# Altium PCB Main_Board.PcbDoc (part 14 of 14)
Units mm, origin at the board's own origin, x right, y up, seen from the top; angles counter-clockwise.
Board outline 142 x 82 mm, 10 copper layers (L1_Top, L2_PWR1, L3_Sig1, L4_GND1, L5_Sig2, L6_Sig3, L7_GND2, L8_Sig4, L9_GND3, L8_Bottom), stack 1.71 mm thick; 299 components, 328 nets, 2329 pads, 2908 vias.
Unrouted connection lines stored in the file: 2.
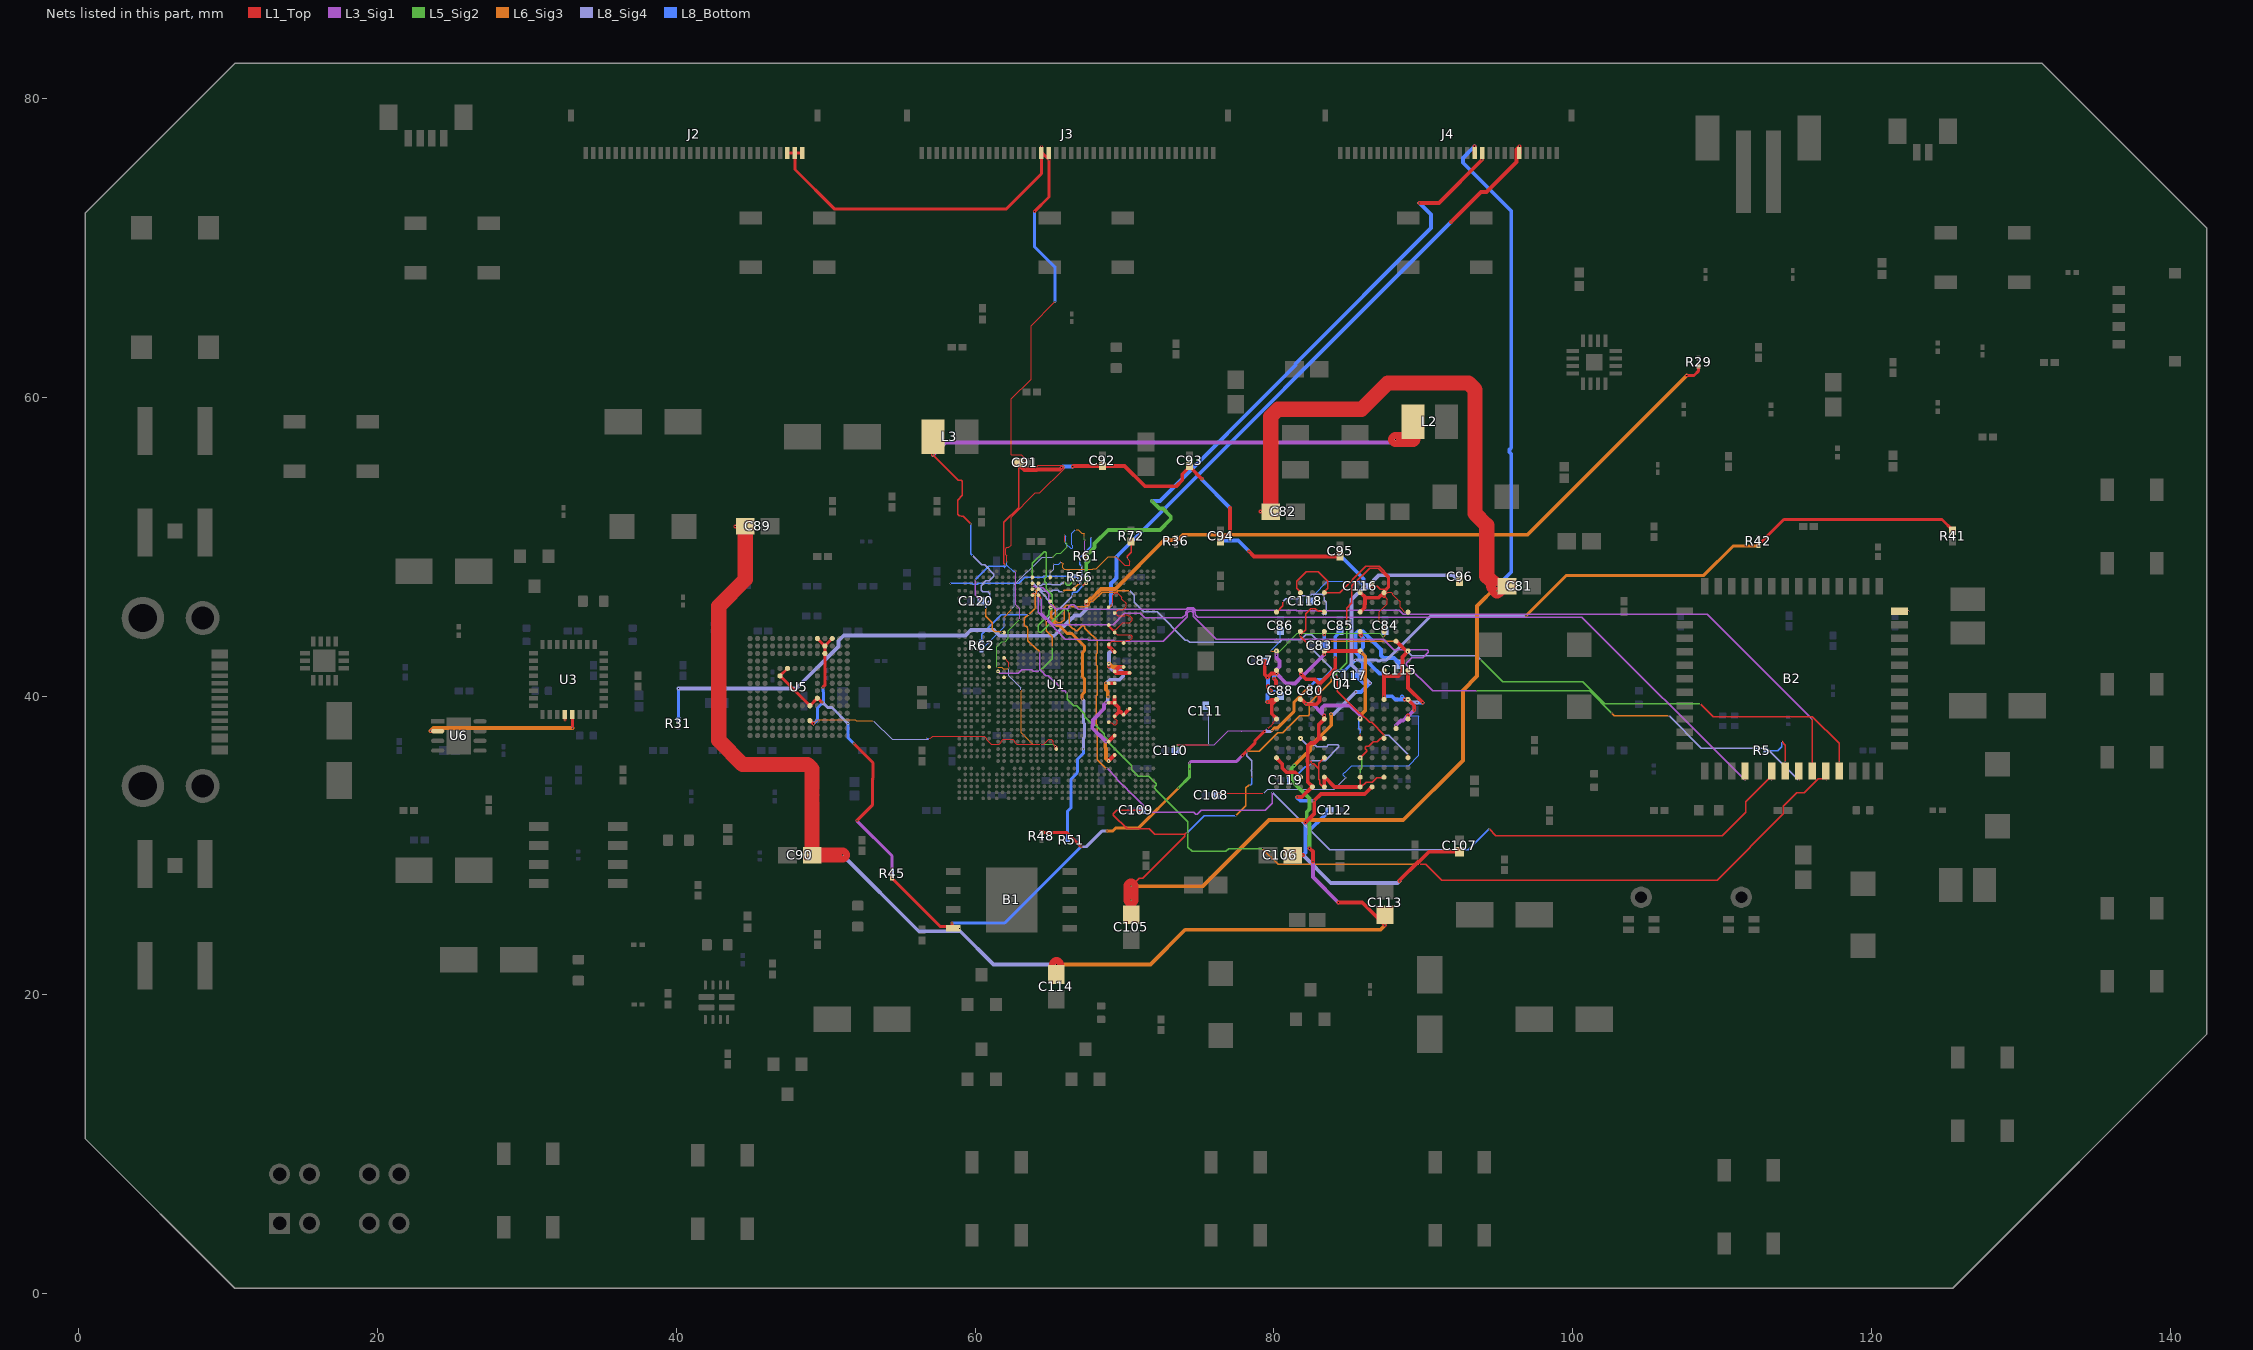
[diagram p21: the nets of this part, all layers, seen from the top]

## Via types
v1: diameter 0.1, hole 0.08, L1_Top to L8_Bottom, 1169 vias
v2: diameter 0.01, hole 0.01, L3_Sig1 to L8_Sig4, 433 vias
v3: diameter 0.01, hole 0.01, L8_Sig4 to L8_Bottom, 375 vias
v4: diameter 0.01, hole 0.01, L1_Top to L3_Sig1, 355 vias
v5: diameter 0.254, hole 0.01, L1_Top to L8_Bottom, 150 vias
v6: diameter 0.01, hole 0.01, L6_Sig3 to L8_Bottom, 129 vias
v7: diameter 0.05, hole 0.04, L1_Top to L8_Bottom, 104 vias
v8: diameter 0.01, hole 0.01, L1_Top to L5_Sig2, 89 vias
v9: diameter 0.01, hole 0.01, L1_Top to L8_Bottom, 41 vias
v10: diameter 0.1, hole 0.08, L1_Top to L3_Sig1, 17 vias
v11: diameter 0.1, hole 0.08, L1_Top to L5_Sig2, 11 vias
v12: diameter 0.1, hole 0.08, L8_Sig4 to L8_Bottom, 10 vias
v13: diameter 0.1, hole 0.08, L6_Sig3 to L8_Bottom, 9 vias
v14: diameter 1.27, hole 0.711, L1_Top to L8_Bottom, 8 vias
v15: diameter 0.4, hole 0.2, L1_Top to L8_Bottom, 4 vias
v16: diameter 0.05, hole 0.08, L1_Top to L8_Bottom, 3 vias
v17: diameter 0.05, hole 0.08, L6_Sig3 to L8_Bottom, 1 vias

## Nets (pads, with @x,y where several pads share a name; then routed paths per layer and width w, separated by ;. In a path a pad name is that pad's centre, name@x,y a point inside that pad or via, vN(x,y) a via of type N, cw(c..) or ccw(c..) an arc to the next point about the centre after c; other vN are vias at no path point) (continued)
VDDIO_3V3: J2.28 J2.29 J2.30 J3.17 J3.18 U1.AJ17 U1.R25 U5.C6 U5.M4 U5.N4 U5.P3 U5.P5 | length 101.6
  L1_Top w0.04: v4(56.936,37.091) 57.159,37.314 60.61,37.314 60.776,37.148 60.776,37.081 61.073,36.784 61.61,36.784 61.741,36.916 61.741,36.983 61.873,37.114 62.51,37.114 62.641,36.983 62.641,36.916 62.773,36.784 64.61,36.784 64.94,37.114 65.11,37.114 65.243,36.981 65.243,36.769 v1(65.388,36.624) ; U1.R25@61.941,42.639 U1.R25@61.941,42.549 62.252,42.239 v4(62.252,41.885) ; v4(62.128,48.972) 62.128,49.376 62.047,49.456 62.047,49.86 62.13,49.943 62.269,49.943 62.416,50.091 62.416,51.979 64.035,53.598 64.339,53.598 65.958,55.217 65.958,55.355 65.86,55.453 64.216,55.453 64.038,55.275 63.376,55.275 63.353,55.298 63.353,55.868 63.08,56.141 62.44,56.141 62.416,56.164 62.416,59.889 63.745,61.218 63.745,64.801 v3(65.34,66.396)
  L1_Top w0.2: J2.28@47.441,76.349 J2.29@47.941,76.349 ; J2.30@48.441,76.349 J2.29@47.941,76.349 ; U5.C6@48.941,38.349 48.964,38.349 v3(49.17,38.143) ; U5.P5@49.441,43.849 U5.N4@49.941,43.349 ; v4(49.808,40.579) 49.941,40.712 U5.M4@49.941,42.849 U5.N4@49.941,43.349 ; U5.P3@50.441,43.849 U5.N4@49.941,43.349 ; v4(63.965,72.424) 64.941,73.4 v1(64.941,75.899) ; J3.17@64.441,76.349 64.441,74.969 62.067,72.594 50.599,72.594 47.941,75.252 J2.29@47.941,76.349 ; J3.17@64.441,76.399 v1(64.441,76.799) ; J3.17@64.466,76.374 v1(64.941,75.899) ; J3.18@64.941,76.349 v1(64.941,75.899) ; v1(65.388,36.624) 65.432,36.581 65.432,36.459 U1.AJ17@65.441,36.449
  L3_Sig1 w0.04: v3(62.726,48.349) 62.726,46.096 62.993,45.83 v8(62.993,45.133)
  L5_Sig2 w0.04: v2(61.478,41.911) 61.451,41.937 61.451,43.311 61.785,43.645 62.011,43.645 62.226,43.861 62.226,44.366 v8(62.993,45.133) ; v2(64.375,36.77) 65.242,36.77 v1(65.388,36.624)
  L6_Sig3 w0.04: v3(49.17,38.143) 49.438,38.411 51.986,38.411 52.051,38.346 v6(53.185,38.346) ; v2(61.478,41.911) 61.799,41.911 61.877,41.833 62.199,41.833 v4(62.252,41.885) ; v6(63.041,40.37) 63.092,40.32 63.092,37.546 63.868,36.77 v2(64.375,36.77)
  L8_Sig4 w0.04: v6(53.185,38.346) 54.439,37.091 v4(56.936,37.091) ; v4(62.252,41.885) 62.252,41.36 63.041,40.57 v6(63.041,40.37)
  L8_Bottom w0.04: v3(56.739,37.18) 56.847,37.18 v4(56.936,37.091) ; v3(61.907,48.542) 62.128,48.764 ; v4(62.128,48.972) 62.128,48.764 ; v3(62.726,48.349) 62.542,48.349 62.128,48.764
  L8_Bottom w0.2: v3(49.17,38.143) 49.444,38.417 49.444,39.202 49.861,39.619 49.861,40.277 49.808,40.331 v4(49.808,40.579) ; v4(63.965,72.424) 63.965,70.097 65.34,68.722 v3(65.34,66.396)
  other v2: 56.936,37.091 49.17,38.143 49.808,40.579 62.252,41.885 62.726,48.349 61.907,48.542 62.128,48.972 65.34,66.396 63.965,72.424
  other v3: 56.936,37.091 49.808,40.579 62.128,48.972 63.965,72.424
  other v4: 49.17,38.143 61.907,48.542 65.34,66.396
VDDIO_BOOT: B1.8 C80.2 R41.2 R42.2 R45.1 R48.2 U5.E6 U5.F5 U5.J10 U5.K9 | length 108.1
  L1_Top w0.2: U5.K9@47.441,41.849 U5.J10@46.941,41.349 U5.E6@48.941,39.349 U5.F5@49.441,39.849 49.482,39.849 49.742,39.589 v4(49.764,39.589) ; v3(51.888,36.806) 53.165,35.529 53.165,34.666 53.177,34.653 53.177,34.501 53.119,34.442 53.119,32.692 v4(52.085,31.658) ; v4(54.441,27.795) 54.473,27.764 57.667,24.569 58.416,24.569 B1.8@58.541,24.444 58.441,24.544 v4(58.441,24.803) ; R48.2@64.441,30.858 66.14,30.858 v4(67.089,29.909) ; v4(77.891,36.014) 78.749,36.872 78.749,37.015 79.352,37.618 v4(79.376,37.618) ; v9(112.441,50.049) 112.441,50.141 112.607,50.306 112.623,50.306 114.14,51.823 124.722,51.823 125.441,51.104 R41.2@125.441,51.058
  L3_Sig1 w0.2: v4(52.085,31.658) 54.441,29.302 v4(54.441,27.795) ; v8(74.349,35.508) 74.473,35.632 77.509,35.632 v4(77.891,36.014)
  L5_Sig2 w0.2: v2(73.618,33.842) 74.369,34.593 v8(74.369,35.101) 74.369,35.488 v8(74.349,35.508)
  L6_Sig3 w0.2: v6(68.842,30.955) 69.202,30.955 69.399,31.152 70.928,31.152 v2(73.618,33.842) ; v6(79.869,37.698) 80.018,37.847 80.229,37.847 81.335,38.953 81.335,39.558 v6(82.441,40.664) ; v6(96.877,45.375) 99.583,48.081 108.785,48.081 110.753,50.049 v9(112.441,50.049)
  L8_Sig4 w0.2: v4(49.764,39.589) 50.129,39.224 50.415,39.224 v3(51.491,38.148) ; v4(67.089,29.909) 67.441,29.909 68.487,30.955 v6(68.842,30.955) ; v4(79.376,37.618) 79.789,37.618 v6(79.869,37.698) ; v3(85.448,42.394) 85.459,42.405 86.915,42.405 86.984,42.336 87.088,42.336 87.157,42.405 87.554,42.405 90.524,45.375 v6(96.877,45.375)
  L8_Bottom w0.2: v3(51.491,38.148) 51.491,37.203 v3(51.888,36.806) ; v4(58.441,24.803) 61.983,24.803 v4(67.089,29.909) ; v6(82.441,40.664) 82.456,40.664 82.91,41.117 83.289,41.117 83.872,41.701 84.755,41.701 v3(85.448,42.394)
  other v1: 58.966,24.444
  other v2: 58.441,24.803 67.089,29.909 51.888,36.806 79.376,37.618 49.764,39.589
  other v3: 58.441,24.803 67.089,29.909
  other v4: 51.888,36.806
VDDIO_H: U1.V25 | length 0.2
  L1_Top w0.04: U1.V25@61.941,41.249 v1(62.116,41.249)
VDDIO_LX: R61.1 R62.1 | length 15.7
  L1_Top w0.04: v4(65.998,50.774) 66.011,50.761 v8(66.011,50.318) ; v4(67.372,49.629) 67.372,49.164 v4(67.441,49.095)
  L3_Sig1 w0.04: v8(67.348,50.425) 67.348,49.654 v4(67.372,49.629)
  L5_Sig2 w0.04: v2(65.208,49.304) 65.47,49.566 65.74,49.566 v8(66.147,49.973) 66.147,50.182 v8(66.011,50.318) ; v2(67.298,50.655) 67.298,50.475 v8(67.348,50.425)
  L6_Sig3 w0.04: v6(61.941,45.281) 62.425,45.764 v6(62.425,45.826) ; v6(66.721,51.128) 66.907,51.128 67.132,50.902 67.275,50.902 67.298,50.879 v2(67.298,50.655)
  L8_Sig4 w0.04: v6(62.425,45.826) 62.62,46.021 62.62,47.443 64.48,49.304 v2(65.208,49.304)
  L8_Bottom w0.04: R62.1@60.441,43.095 60.441,43.141 61.941,44.641 v6(61.941,45.281) ; v4(65.998,50.774) 66.08,50.692 66.08,50.205 66.396,49.889 66.471,49.889 66.525,49.942 66.525,50.083 66.478,50.13 66.478,50.885 v6(66.721,51.128)
  other v2: 67.441,49.095 65.998,50.774
  other v3: 67.441,49.095 65.998,50.774
VDDIO_M: L2.1 L3.1 U1.L25 | length 51.1
  L1_Top w0.1: v1(57.19,56.126) 58.888,54.428 59.088,54.428 59.147,54.369 59.147,53.435 58.828,53.116 58.828,52.181 58.929,52.081 59.023,52.081 59.074,52.03 59.197,52.03 v4(59.711,51.516)
  L1_Top w0.254: v1(57.19,56.146) L3.1@57.19,57.349
  L1_Top w1.016: v1(88.134,57.167) 89.29,57.167 89.316,57.193 L2.1@89.316,58.349
  L3_Sig1 w0.254: v1(57.19,56.126) 58.028,56.964 87.931,56.964 v1(88.134,57.167)
  L5_Sig2 w0.1: v2(61.738,44.249) 61.831,44.249 v8(61.843,44.261)
  L6_Sig3 w0.1: v6(60.701,45.862) 60.724,45.839 60.724,45.331 61.14,44.916 61.14,44.466 61.318,44.288 61.698,44.288 v2(61.738,44.249)
  L8_Sig4 w0.1: v3(59.829,49.39) 60.446,48.773 60.631,48.773 61.248,48.155 61.248,48.013 60.94,47.705 60.705,47.705 60.397,47.398 60.397,47.077 60.499,46.976 60.875,46.976 60.991,46.86 60.991,46.57 61.067,46.494 61.067,46.406 61.014,46.353 60.929,46.353 60.724,46.148 60.724,45.885 v6(60.701,45.862)
  L8_Bottom w0.1: v4(59.711,51.516) 59.711,49.508 v3(59.829,49.39)
  other v2: 59.711,51.516
  other v3: 59.711,51.516
VDDIO_X: R51.2 U1.G18 | length 17.5
  L6_Sig3 w0.203: v9(65.086,45.917) 65.086,45.263 65.209,45.14 65.209,44.97 65.462,44.717 65.632,44.717 66.167,44.183 66.476,44.183 67.313,43.345 67.313,43.038 67.201,42.927 67.201,41.272 67.313,41.16 67.313,40.25 67.151,40.088 67.151,39.837 v6(67.196,39.793)
  L8_Sig4 w0.203: v6(67.196,39.793) 67.277,39.711 67.277,38.938 67.245,38.905 67.245,38.227 67.313,38.158 67.313,37.249 67.265,37.201 v3(67.265,36.454)
  L8_Bottom w0.203: R51.2@66.187,30.349 66.187,32.287 66.435,32.535 66.435,34.443 66.823,34.831 66.823,34.913 66.87,34.96 66.87,35.787 67.265,36.182 v3(67.265,36.454)
VDDIO_Z: U1.T28
VDDIOC_SW: J4.20 U1.C12 U1.U26 | length 55.5
  L1_Top w0.1: v4(67.217,47.369) 67.22,47.369 67.401,47.549 v8(67.441,47.549)
  L1_Top w0.254: v4(89.76,73.007) 91.049,73.007 v1(93.941,75.899) J4.20@93.941,76.349
  L3_Sig1 w0.1: v4(61.541,41.649) 61.661,41.529 62.876,41.529 63.116,41.769 63.782,41.769 63.902,41.649 v8(64.303,41.649)
  L5_Sig2 w0.1: v8(64.303,41.649) 64.316,41.649 64.42,41.752 64.42,41.776 64.49,41.846 64.513,41.846 65.161,42.494 65.161,43.272 v2(65.167,43.278)
  L5_Sig2 w0.254: v8(67.441,47.549) 67.441,48.88 67.593,49.032 67.593,49.158 67.492,49.259 67.492,49.451 67.995,49.953 67.995,50.204 68.91,51.119 72.376,51.119 73.1,51.843 73.1,52.028 72.582,52.546 72.348,52.546 v9(71.83,53.064)
  L6_Sig3 w0.1: v6(64.779,45.066) 64.779,44.366 65.167,43.978 v2(65.167,43.278)
  L8_Sig4 w0.1: v6(64.779,45.066) 65.587,45.874 65.711,45.874 66.511,46.673 v3(66.511,46.688)
  L8_Bottom w0.1: v3(66.511,46.688) 66.506,46.693 66.506,46.9 66.565,46.959 66.807,46.959 v4(67.217,47.369)
  L8_Bottom w0.254: v9(71.83,53.064) 72.369,53.064 81.449,62.144 81.449,62.242 90.53,71.323 90.53,72.237 v4(89.76,73.007)
  other v2: 67.217,47.369 89.76,73.007
  other v3: 67.217,47.369 89.76,73.007
VDDNPU_PWM: U1.F18
VDDQ_1V1: C81.1 C82.1 C83.1 C84.1 C85.1 C86.1 C87.1 C88.1 C105.1 C106.1 C107.1 C108.1 C109.1 C110.1 C111.1 C112.1 J4.19 U4.A4 U4.A9 U4.AB4 U4.F5 U4.F8 U4.G2 U4.H1 U4.H5 U4.H8 U4.H12 U4.K1 U4.K3 U4.K10 U4.K12 U4.N1 U4.N3 U4.N10 U4.N12 U4.R1 U4.R5 U4.R8 U4.R12 U4.T2 U4.U5 U4.U8 | length 281.6
  L1_Top w0.04: v8(73.524,36.729) 75.636,36.729 v4(75.658,36.751) ; v4(76.153,33.323) 76.305,33.475 v2(79.309,33.475) ; v4(79.58,37.839) 79.615,37.839 79.789,38.013 79.844,38.013 79.894,38.062 79.894,38.118 79.955,38.179 79.955,38.243 U4.H12@80.18,38.468 ; U4.R12@80.153,43.002 80.164,43.002 U4.R12@80.18,43.018
  L1_Top w0.1: v1(70.441,27.272) 70.973,27.803 71.211,27.803 74.03,30.622 74.03,30.754 ; v4(71.15,32.337) 71.138,32.349 69.479,32.349 69.256,32.126 69.256,32.026 70.174,31.108 71.667,31.108 72.021,30.754 74.03,30.754 ; v4(74.173,30.811) 74.171,30.813 74.089,30.813 74.03,30.754 ; v8(84.873,44.704) 84.873,45.89 85.228,46.245 85.228,47.373 86.405,48.551 86.991,48.551 87.62,47.922 87.62,47.327 87.451,47.158 87.111,47.158 86.921,47.348 v1(86.58,47.348) ; U4.F5@85.78,37.168 85.795,37.183 v4(85.795,37.456)
  L1_Top w0.254: C105.1@70.441,25.349 v1(70.441,26.344) ; v1(79.113,52.349) C82.1@79.79,52.349 ; v4(79.387,42.349) 79.387,41.44 v4(79.58,41.248) 79.83,41.498 v1(80.18,41.498) ; v4(79.58,39.601) 79.683,39.601 79.834,39.752 80.164,39.752 U4.K12@80.18,39.768 80.18,39.745 79.863,39.428 79.863,38.808 80.18,38.491 U4.H12@80.18,38.468 ; v4(79.603,40.68) 79.603,40.556 v3(79.81,40.349) ; v3(80.01,41.162) 80.146,41.026 v4(80.146,40.689) ; C106.1@81.267,29.349 v1(81.944,29.349) ; v3(81.587,33.231) 81.87,33.231 82.58,33.941 82.263,34.258 82.263,35.567 82.235,35.595 82.235,35.761 82.263,35.788 82.263,36.649 82.465,36.851 82.711,36.851 83.012,37.152 ; U4.K10@81.78,39.768 81.796,39.752 81.886,39.752 v4(82.159,39.479) 82.187,39.451 82.849,39.451 83.063,39.665 83.063,40.809 ; U4.N10@81.78,41.718 81.796,41.701 81.796,41.481 v1(81.829,41.449) 82.158,41.12 82.752,41.12 83.063,40.809 ; v3(82.126,31.537) 82.698,32.109 v4(82.698,32.989) 83.154,33.445 86.084,33.445 86.557,33.918 U4.A4@86.58,33.918 ; U4.F8@83.38,37.168 83.364,37.152 83.012,37.152 ; v1(83.38,38.688) U4.H8@83.38,38.468 83.012,38.1 83.012,37.152 ; v1(83.38,42.798) U4.R8@83.38,43.018 U4.R5@85.78,43.018 ; v1(83.38,44.098) U4.U8@83.38,44.318 ; v4(84.106,42.559) 84.106,41.852 83.063,40.809 ; U4.U5@85.78,44.318 85.796,44.302 85.796,44.082 v1(85.834,44.044) ; v1(86.58,47.348) U4.AB4@86.58,47.568 ; U4.K3@87.38,39.768 v1(87.38,39.988) v1(87.38,41.498) ; U4.N3@87.38,41.718 v1(87.38,41.498) ; U4.T2@88.196,43.652 88.22,43.652 88.837,43.034 88.964,43.034 U4.R1@88.98,43.018 88.98,42.995 88.604,42.619 88.604,41.595 88.34,41.331 87.547,41.331 v1(87.38,41.498) ; v4(88.418,27.621) 88.418,27.668 89.675,28.925 89.734,28.925 90.38,29.571 C107.1@92.441,29.571 ; v1(88.76,39.768) v2(88.98,39.768) 89.404,39.344 v4(89.404,39.058) ; U4.H1@88.98,38.468 v1(88.98,38.688) ; U4.N1@88.98,41.718 88.98,40.545 v4(89.969,39.556) ; J4.19@93.441,76.349 v1(93.441,76.799)
  L1_Top w1.016: v1(70.441,26.344) v1(70.441,27.272) ; C82.1@79.79,52.349 79.79,58.717 80.272,59.199 85.873,59.199 87.626,60.952 93.023,60.952 93.468,60.507 93.468,52.214 94.255,51.427 94.255,48.021 v1(94.927,47.349) ; 94.714,47.349 v1(94.927,47.349) ; C81.1@95.616,47.349 C81.1@95.256,47.349 ; v1(94.927,47.349) v1@94.938,47.349 ; v1@94.938,47.349 C81.1@95.256,47.349 ; v1@94.938,47.349 v1(94.938,47.032) C81.1@95.256,47.349
  L3_Sig1 w0.04: v8(73.524,36.729) 75.997,36.729 76.931,37.663 77.795,37.663 77.806,37.652 77.844,37.652 77.855,37.663 79.404,37.663 v4(79.58,37.839)
  L3_Sig1 w0.254: v1(80.174,42.804) v8(80.174,42.714) 80.174,42.554 80.377,42.35 80.377,41.962 80.18,41.765 v1(80.18,41.498) 80.835,40.843 81.411,40.843 81.923,41.355 v1(81.829,41.449) 82.031,41.449 v1(83.38,42.798) ; v4(82.159,39.479) 82.589,39.479 83.232,38.836 ; v1(83.38,38.688) 83.232,38.836 ; v4(85.78,38.486) v1(85.78,38.547) 85.78,38.688 85.098,39.37 83.38,39.37 83.232,39.221 83.232,38.836 ; v1(88.18,38.038) 88.508,38.366 88.658,38.366 v1(88.98,38.688) 89.034,38.688 v4(89.404,39.058)
  L5_Sig2 w0.04: v9(73.441,36.349) 73.524,36.432 v8(73.524,36.729) ; v2(80.158,43.002) 80.174,42.987 v1(80.174,42.804) ; v8(80.174,42.714) v1(80.174,42.804) ; v2(87.331,43.944) 87.087,44.188 84.873,44.188 81.57,44.188 80.186,42.804 v1(80.174,42.804)
  L5_Sig2 w0.1: v2(83.835,41.194) 84.873,42.232 84.873,44.188 v8(84.873,44.704)
  L6_Sig3 w0.04: v6(79.806,43.032) 79.836,43.002 v2(80.158,43.002) ; v2(87.331,43.944) 87.441,44.054 v6(87.441,44.349)
  L6_Sig3 w0.1: v6(77.451,31.988) 78.122,32.659 78.122,33.847 78.309,34.034 v6(78.398,34.034) ; v6(78.185,36.308) 79.011,36.308 80.26,37.557 80.599,37.557 81.73,38.688 82.315,38.688 82.385,38.758 82.385,39.523 83.835,40.972 v9(83.835,41.163)
  L6_Sig3 w0.254: v1(70.441,27.272) 75.256,27.272 79.676,31.691 88.667,31.691 92.655,35.679 92.655,40.378 93.609,41.332 93.609,46.031 v1(94.927,47.349) ; v1(85.78,38.547) 85.78,38.688 86.115,39.023 86.115,42.663 v1(85.88,42.898)
  L8_Sig4 w0.04: v3(75.441,39.349) 75.658,39.133 v4(75.658,36.751) ; v2(79.309,33.475) 79.588,33.754 84.057,33.754 v3(84.824,34.521)
  L8_Sig4 w0.1: v6(78.185,36.308) 78.185,36.007 78.53,35.662 78.53,35.069 78.5,35.039 78.5,34.977 78.53,34.947 v3(78.53,34.588)
  L8_Sig4 w0.254: v1(81.944,29.349) 83.813,27.481 88.278,27.481 v4(88.418,27.621) ; v2(88.98,39.768) 89.186,39.562 v3(89.58,39.562)
  L8_Bottom w0.04: v6(79.806,43.032) 80.441,43.667 C86.1@80.441,44.349 ; v3(84.824,34.521) 84.663,34.683 84.663,34.801 84.759,34.898 84.772,34.898 85.222,35.348 89.017,35.348 89.713,36.044 89.713,38.643 89.668,38.688 v1(88.98,38.688)
  L8_Bottom w0.1: v4(74.173,30.811) 75.35,31.988 v6(77.451,31.988) ; v6(78.398,34.034) 78.43,34.034 78.53,34.134 v3(78.53,34.588) ; v3(79.81,40.349) 80.087,40.349 80.214,40.222 80.26,40.222 80.441,40.041 C88.1@80.441,39.995 ; v1(85.78,38.547) 85.694,38.461 85.694,37.84 85.795,37.738 v4(85.795,37.456)
  L8_Bottom w0.254: v4(79.58,39.601) 79.58,40.119 v3(79.81,40.349) ; v4(79.58,41.248) 79.603,41.224 v4(79.603,40.68) ; v3(80.01,41.162) 80.01,41.328 v1(80.18,41.498) ; v3(81.587,33.231) 81.587,33.165 81.763,32.989 v4(82.698,32.989) ; v1(81.944,29.349) 82.126,29.531 82.126,30.742 ; v3(82.126,31.537) 82.126,30.742 ; v1(83.38,42.798) v1(83.38,44.098) ; C112.1@83.733,32.349 83.687,32.349 83.583,32.245 83.583,32.199 82.126,30.742 ; v4(84.106,42.559) 84.106,43.968 84.441,44.303 C85.1@84.441,44.349 ; v1(85.834,44.044) 85.977,43.901 85.977,43.262 85.88,43.166 v1(85.88,42.898) 85.994,42.784 85.994,42.584 86.462,42.116 86.462,42.095 86.56,41.997 86.581,41.997 87.08,41.498 v1(87.38,41.498) v1(87.38,39.988) 87.901,39.988 88.121,39.768 v1(88.76,39.768) 88.583,39.945 v3(88.583,39.974) ; v3(89.58,39.562) 89.586,39.556 v4(89.969,39.556) ; v1(93.441,76.799) 92.653,76.011 92.653,75.702 95.887,72.468 95.887,56.614 95.774,56.5 95.774,56.316 95.887,56.202 95.887,48.309 v1(94.927,47.349)
  other v2: 88.418,27.621 74.173,30.811 82.126,31.537 71.15,32.337 82.698,32.989 81.587,33.231 76.153,33.323 75.658,36.751 85.795,37.456 89.969,39.556 79.58,39.601 88.583,39.974 79.81,40.349 79.603,40.68 80.146,40.689 80.01,41.162 79.58,41.248 79.387,42.349 84.106,42.559
  other v3: 74.173,30.811 71.15,32.337 82.698,32.989 76.153,33.323 85.795,37.456 85.78,38.547 89.969,39.556 79.58,39.601 79.603,40.68 80.146,40.689 79.58,41.248 79.387,42.349 84.106,42.559
  other v4: 82.126,31.537 81.587,33.231 79.309,33.475 88.98,39.768 88.583,39.974 79.81,40.349 80.01,41.162 86.58,47.348
VDDQ_VDDQLP_EN: U1.D14
VDDQLP_0V6_1V1: J4.25 U1.AA8 U1.AB8 U1.AB9 U1.AC5 U1.AD6 U1.AD8 U1.AE9 U1.AG8 U1.AH9 U1.AK8 U1.AL9 U1.G9 U1.H8 U1.K9 U1.L8 U1.M6 U1.N9 U1.P8 U1.T6 U1.T9 U1.U5 U1.U8 U1.W8 U1.W9 | length 73
  L1_Top w0.04: U1.AE9@68.941,38.249 68.982,38.209 69.148,38.209 69.273,38.084 69.41,38.084 69.506,38.181 69.506,38.349 69.263,38.593 69.285,38.593 69.506,38.814 ; U1.N9@68.941,43.449 69.146,43.654 70.049,43.654 70.129,43.735 70.361,43.735 70.506,43.881 70.506,44.018 70.41,44.114 69.533,44.114 69.398,44.249 U1.L8@69.341,44.249 68.982,44.609 U1.K9@68.982,44.709 ; U1.K9@68.941,44.749 U1.K9@68.982,44.709 ; U1.G9@68.941,45.949 68.982,45.989 69.093,45.989 69.167,46.063 69.167,46.241 69.206,46.281 69.206,46.474 69.2,46.481 69.2,46.674 69.206,46.681 69.206,46.748 69.373,46.914 69.51,46.914 69.808,46.616 69.808,46.494 70.106,46.196 70.106,45.981 69.911,45.785 69.577,45.785 U1.H8@69.341,45.549 69.385,45.549 69.55,45.384 70.01,45.384 70.065,45.439 70.183,45.439 70.238,45.384 70.34,45.384 70.506,45.218 70.506,45.081 70.34,44.914 69.873,44.914 69.637,44.678 69.637,44.669 69.4,44.433 69.258,44.433 U1.K9@68.982,44.709
  L1_Top w0.1: U1.G9@68.941,45.949 68.961,45.949 v4(69.102,46.09)
  L1_Top w0.254: v9(68.941,35.649) U1.AK8@69.341,36.049 ; U1.AH9@68.941,36.949 U1.AG8@69.341,37.349 ; U1.AB9@68.941,39.549 U1.AB8@69.341,39.549 ; U1.W9@68.941,40.849 U1.W8@69.341,40.849 ; U1.T9@68.941,42.149 68.941,41.994 v4(68.964,41.971) ; U1.N9@68.941,43.449 68.941,43.349 v1(69.188,43.103) U1.P8@69.341,42.949 ; U1.AD8@69.341,38.649 69.506,38.814 69.613,38.921 ; U1.AA8@69.341,39.949 69.341,39.51 69.613,39.238 69.613,38.921 ; v1(69.766,41.949) 69.641,41.949 U1.U8@69.341,41.649 69.441,41.549 U1.U5@70.341,41.549 ; U1.AC5@70.341,39.149 U1.AD6@69.941,38.749 69.769,38.921 69.613,38.921 ; v2(91.861,71.731) 93.868,73.738 94.231,73.738 96.238,75.745 96.238,76.596 v1(96.441,76.799) J4.25@96.441,76.349
  L3_Sig1 w0.254: v1(68.766,36.949) 68.32,37.396 68.291,37.396 67.844,37.843 67.844,38.018 67.887,38.061 67.887,38.391 68.638,39.143 68.638,39.421 v1(68.766,39.549)
  L6_Sig3 w0.254: v1(68.766,36.949) 68.71,36.892 68.71,36.543 68.766,36.486 68.766,35.824 v9(68.941,35.649) ; v1(68.766,40.849) 68.766,40.443 68.885,40.324 v6(68.885,39.949) ; v9(68.971,42.179) 69.201,41.949 v1(69.766,41.949)
  L8_Sig4 w0.254: v1(68.766,39.549) 68.885,39.668 v6(68.885,39.949) ; v1(68.766,40.849) 69.011,41.094 69.672,41.094 69.917,41.339 69.917,41.566 69.756,41.726 69.209,41.726 v4(68.964,41.971) 68.964,42.879 v1(69.188,43.103)
  L8_Bottom w0.254: v4(69.102,46.09) 69.102,47.531 69.463,47.892 69.463,49.305 69.525,49.366 69.525,49.395 v2(91.861,71.731)
  other v1: 69.941,38.924 70.166,39.149
  other v2: 68.964,41.971 69.102,46.09
  other v3: 69.102,46.09 91.861,71.731
  other v4: 91.861,71.731
VDDQLP¨_0V6_1V1: C89.1 C90.1 C91.1 C92.1 C93.1 C94.1 C95.1 C96.1 C113.1 C114.1 C115.1 C116.1 C117.1 C118.1 C119.1 C120.1 | length 163.6
  L1_Top w0.1: v4(62.017,48.784) 61.928,48.873 61.928,51.618 62.929,52.619 C91.1@62.929,55.618
  L1_Top w0.254: v1(43.938,51.349) C89.1@44.616,51.349 ; C91.1@62.94,55.618 63.116,55.442 63.116,55.299 63.307,55.108 64.107,55.108 64.167,55.168 65.673,55.168 v2(65.791,55.286) ; v4(66.539,55.363) 66.567,55.391 C92.1@68.525,55.391 70.011,55.391 71.353,54.049 73.479,54.049 73.871,54.44 73.871,54.849 C93.1@74.367,55.345 ; C93.1@74.367,55.391 C93.1@74.367,55.345 ; v3(75.185,54.538) 75.174,54.538 C93.1@74.367,55.345 ; v3(76.441,50.404) 76.45,50.404 76.68,50.634 76.734,50.634 77.066,50.966 v3(77.066,52.591) ; v4(78.329,49.687) 78.667,49.349 84.387,49.349 v3(84.441,49.404) ; v8(82.395,29.81) 82.621,29.584 v4(82.621,28.93) ; v4(84.315,26.18) 85.917,26.18 v1(87.441,24.655)
  L1_Top w1.016: C89.1@44.616,51.349 44.616,47.791 42.846,46.021 42.846,37.012 44.433,35.425 48.775,35.425 49.092,35.107 C90.1@49.092,29.349 v1(51.126,29.349) ; C114.1@65.441,21.349 v1(65.441,22.027)
  L3_Sig1 w0.1: v3(60.001,47.787) 60.001,46.79 v2(60.441,46.349)
  L3_Sig1 w0.254: v4(82.621,28.93) 82.621,27.874 v4(84.315,26.18)
  L5_Sig2 w0.254: v2(81.367,35.354) 81.174,35.161 v9(81.174,34.273) 81.252,34.273 82.395,33.131 82.395,32.442 82.198,32.245 82.198,31.68 82.395,31.483 v8(82.395,29.81)
  L6_Sig3 w0.254: v1(65.441,22.027) 71.738,22.027 74.062,24.351 87.137,24.351 v1(87.441,24.655) ; v2(81.367,35.354) 82.138,36.124 82.202,36.124 82.428,36.35 82.428,36.629 83.842,38.043 83.842,38.764 v6(83.83,38.776)
  L8_Sig4 w0.254: v1(51.126,29.349) 56.226,24.249 58.883,24.249 58.885,24.247 59.002,24.247 61.222,22.027 v1(65.441,22.027) ; v6(83.83,38.776) 83.997,38.776 v3(85.481,40.26) ; v3(86.438,40.854) 85.201,42.091 85.201,46.454 v3(86.096,47.349) 86.303,47.349 87.044,48.09 91.992,48.09 v2(92.441,47.641)
  L8_Bottom w0.04: C118.1@82.441,46.349 82.487,46.349 82.698,46.561 82.698,46.794 83.587,47.682 85.673,47.682 85.795,47.561 85.893,47.561 86.096,47.358 v3(86.096,47.349)
  L8_Bottom w0.1: v3(60.001,47.787) 60.911,48.696 61.929,48.696 v4(62.017,48.784)
  L8_Bottom w0.254: v2(65.791,55.286) 65.868,55.363 v4(66.539,55.363) ; v3(75.185,54.538) 75.185,54.472 v3(77.066,52.591) ; v3(76.441,50.404) 77.613,50.404 v4(78.329,49.687) ; v3(84.441,49.404) 86,47.845 86,47.445 v3(86.096,47.349) ; C117.1@85.441,41.349 C117.1@85.487,41.349 ; v3(85.481,40.26) 85.844,40.26 v3(86.438,40.854) 85.982,40.854 C117.1@85.487,41.349 ; C115.1@88.441,42.127 88.441,42.138 88.034,42.546 87.353,42.546 87.183,42.716 87.183,43.105 85.97,44.318 85.616,44.318 85.467,44.169 85.467,42.925 85.72,42.671 85.72,42.47 85.977,42.213 85.977,41.839 C117.1@85.487,41.349
  other v1: 87.441,24.672
  other v2: 60.001,47.787 62.017,48.784 84.441,49.404 78.329,49.687 76.441,50.404 77.066,52.591 75.185,54.538 66.539,55.363
  other v3: 60.441,46.349 62.017,48.784 78.329,49.687 65.791,55.286 66.539,55.363
  other v4: 92.441,47.641 84.441,49.404 76.441,50.404 77.066,52.591 75.185,54.538 65.791,55.286
VDQLP_0V6_1V1: U4.A5 U4.A8 U4.AA3 U4.AA5 U4.AA8 U4.AA10 U4.B3 U4.B5 U4.B8 U4.B10 U4.D1 U4.D5 U4.D8 U4.D12 U4.F3 U4.F10 U4.U3 U4.U10 U4.W1 U4.W5 U4.W8 U4.W12 | length 62
  L1_Top w0.05: U4.U3@87.38,44.318 87.38,44.664 87.047,44.997 87.047,45.658 87.308,45.918 87.334,45.918 87.595,46.179 87.595,46.483 v1(87.38,46.698) 87.631,46.949 87.874,46.949 87.965,46.858 87.965,46.779 88.186,46.558 88.194,46.558 88.45,46.302 88.45,45.928 v1(88.76,45.618) U4.W1@88.98,45.618
  L1_Top w0.1: U4.W12@80.18,45.618 80.595,46.032 v4(80.595,46.323) ; v1(81.78,46.698) U4.AA10@81.78,46.918 81.78,46.976 81.54,47.216 81.54,47.667 82.183,48.311 82.977,48.311 83.62,47.667 83.62,47.216 83.38,46.976 U4.AA8@83.38,46.918 84.402,46.918 86.155,48.671 87.041,48.671 87.74,47.972 87.74,47.277 U4.AA3@87.381,46.918 ; v2(82.249,43.121) v2(82.249,43.196) 82.249,43.538 81.78,44.007 v1(81.78,44.098) 82.13,44.448 82.13,45.508 82.481,45.858 82.778,45.858 82.972,45.664 83.334,45.664 U4.W8@83.38,45.618 83.335,45.573 v2(83.204,45.573) ; v4(82.432,35.673) 82.506,35.599 82.506,35.458 82.679,35.458 82.979,35.158 83.018,35.158 ; U4.A8@83.38,33.918 83.334,33.964 83.234,33.964 83.063,34.135 83.063,34.137 83.061,34.139 83.061,34.368 83.018,34.411 83.018,35.158 ; U4.D8@83.38,35.868 83.38,35.858 83.018,35.496 83.018,35.158 ; v4(84.256,41.349) 84.256,40.303 85.713,38.845 85.792,38.845 86.41,38.228 86.54,38.228 v1(87.38,37.388) ; v1(85.78,34.788) U4.B5@85.78,34.568 U4.A5@85.78,33.918 85.845,33.918 86.17,34.243 86.594,34.243 86.873,34.522 87.334,34.522 U4.B3@87.38,34.568 ; v8(85.78,35.868) 86.211,36.299 86.211,36.381 86.121,36.471 86.121,36.566 86.188,36.633 86.356,36.633 86.651,36.928 86.92,36.928 v1(87.38,37.388) ; U4.F3@87.38,37.168 v1(87.38,37.388) ; U4.D1@88.98,35.868 v1(88.98,36.088)
  L1_Top w0.254: U4.D12@80.18,35.868 80.18,35.845 80.556,35.469 80.556,35.194 80.849,34.901 81.424,34.901 v3(81.662,34.663) ; U4.A8@83.38,33.918 U4.B8@83.38,34.568 83.403,34.568 84.053,33.918 U4.A5@85.78,33.918 ; U4.W5@85.78,45.618 86.065,45.903 86.065,46.13 86.097,46.161 86.097,46.578 ; U4.AA5@85.78,46.918 85.803,46.918 86.136,46.585 87.024,46.585 87.357,46.918 U4.AA3@87.38,46.918 v1(87.38,46.698)
  L5_Sig2 w0.1: v1(85.78,34.788) 85.78,35.078 85.9,35.198 85.9,35.748 v8(85.78,35.868)
  L8_Sig4 w0.1: v4(80.595,46.323) 80.782,46.51 81.592,46.51 v1(81.78,46.698) 82.397,46.698 82.521,46.823 83.255,46.823 v1(83.38,46.698) 83.38,46.408 83.5,46.288 83.5,45.518 v1(83.38,45.398) v2@83.205,45.573 ; v2(81.78,37.168) 82.233,36.715 82.783,36.715 82.88,36.618 83.528,36.618 83.646,36.737 84.294,36.737 84.353,36.678 84.353,36.595 83.431,35.673 v4(82.432,35.673) ; v2(82.249,43.196) 82.501,43.196 83.843,41.855 83.843,41.762 v4(84.256,41.349) ; v1(87.38,37.388) 87.68,37.388 v1(88.98,36.088)
  L8_Bottom w0.1: v3(81.662,34.663) 81.662,34.83 82.096,35.264 82.278,35.264 v4(82.489,35.475)
  other v2: 81.662,34.663 82.489,35.475 82.432,35.673 84.256,41.349 80.595,46.323
  other v3: 82.489,35.475
  other v4: 81.662,34.663 81.78,37.168 82.249,43.121 82.249,43.196 83.204,45.573
VVDDAO_3V3_POR: R36.2
WD_RSTO: R29.1 R31.2 U1.F12 | length 80.6
  L1_Top w0.203: v1(67.441,46.174) U1.F12@67.441,46.349 ; v1(107.641,61.46) 108.124,61.46 108.441,61.777 R29.1@108.441,62.095
  L6_Sig3 w0.254: v1(67.441,46.174) 67.441,46.271 67.71,46.54 67.807,46.54 68.427,47.16 69.389,47.16 72.667,50.438 73.543,50.438 73.896,50.792 96.973,50.792 v1(107.641,61.46)
  L8_Sig4 w0.254: v12(40.141,40.505) 48.027,40.505 50.847,43.324 50.847,43.705 51.202,44.061 59.356,44.061 59.711,44.417 61.261,44.417 61.344,44.333 61.344,44.326 61.46,44.211 61.466,44.211 61.642,44.036 65.303,44.036 66.484,45.217 66.525,45.217 66.544,45.235 66.544,45.278 66.659,45.393 66.823,45.393 66.833,45.384 67.043,45.384 67.441,45.782 v1(67.441,46.174)
  L8_Bottom w0.203: R31.2@40.141,38.406 v12(40.141,40.505)
WIFI_32K: R72.1 U1.B18 | length 9.3
  L1_Top w0.04: v4(69.451,49.321) 70.025,48.747 70.334,48.747 70.358,48.771 70.358,49.031 v1(70.176,49.212)
  L1_Top w0.1: v1(65.041,47.774) U1.B18@65.041,47.949 ; v1(70.176,49.212) 70.176,49.355 70.441,49.62 R72.1@70.441,50.349
  L6_Sig3 w0.04: v6(65.771,49.004) 65.771,48.969 65.889,48.851 65.889,48.818 65.859,48.788 65.859,48.58 65.957,48.482 67.886,48.482 67.92,48.516 68.125,48.516 68.93,49.321 v4(69.451,49.321)
  L8_Sig4 w0.04: v1(65.041,47.774) 65.041,48.269 65.253,48.481 v3(65.253,48.831)
  L8_Bottom w0.04: v3(65.253,48.831) 65.598,48.831 v6(65.771,49.004)
  other v2: 69.451,49.321
WIFI_PWREN: B2.15 U1.E20 | length 54.9
  L1_Top w0.1: U1.E20@64.241,46.749 v1(64.436,46.555) ; v1(111.541,34.358) B2.15@111.541,34.973
  L3_Sig1 w0.1: v1(64.436,46.555) 64.436,45.585 65.238,44.783 66.899,44.783 67.041,44.782 69.247,44.783 69.998,45.534 71.065,45.534 71.37,45.229 73.881,45.229 74.098,45.447 74.098,45.616 74.284,45.802 74.546,45.802 74.732,45.616 74.732,45.447 74.901,45.278 100.622,45.278 v1(111.541,34.358)
WIFI_SD_CLK: B2.18 R5.1 | length 3.6
  L1_Top w0.1: v1(113.987,36.974) 114.241,36.72 B2.18@114.241,34.973
  L8_Bottom w0.1: R5.1@112.95,36.349 113.737,36.349 113.987,36.6 v1(113.987,36.974)
  other v1: 114.241,35.586
WIFI_SD_CMD: B2.17 R61.2 U1.B21 | length 83
  L1_Top w0.1: v1(63.841,47.774) U1.B21@63.841,47.949 ; v4(94.421,31.1) 94.865,30.656 110.031,30.656 111.586,32.211 111.586,32.905 B2.17@113.341,34.661 ; v1(113.341,34.361) B2.17@113.341,34.661 ; B2.17@113.341,34.973 B2.17@113.341,34.661
  L3_Sig1 w0.1: v2(68.841,35.149) 69.483,34.507 69.483,34.422 69.946,33.959 69.974,33.959 70.437,33.496 70.437,33.485 70.507,33.415 70.518,33.415 71.725,32.208 74.643,32.208 74.763,32.088 74.863,32.088 75.139,32.365 79.44,32.365 79.904,32.829 v2(79.904,33.55)
  L5_Sig2 w0.1: v1(63.841,47.774) 63.841,48.872 64.617,49.648 64.7,49.648 64.759,49.589 64.759,47.985 64.671,47.897 64.671,47.657 64.761,47.566 64.761,47.184 64.774,47.172 64.792,47.172 64.836,47.128 64.836,47.109 65.161,46.784 65.161,45.886 64.94,45.664 64.94,45.434 64.233,44.727 64.233,44.351 64.318,44.265 64.439,44.265 66.017,45.843 66.1,45.843 66.117,45.826 66.12,45.826 66.175,45.771 66.181,45.771 v2(66.308,45.644)
  L6_Sig3 w0.1: v6(65.887,46.994) 65.973,47.08 66.475,47.08 v6(66.925,47.529) ; v2(66.308,45.644) 66.309,45.643 66.309,44.743 66.551,44.501 66.608,44.501 66.75,44.358 66.833,44.358 67.169,44.694 67.28,44.694 67.35,44.624 67.35,44.524 67.505,44.369 67.516,44.369 68.161,43.724 68.161,42.874 68.111,42.824 68.111,42.074 68.161,42.024 68.161,40.095 68.1,40.034 68.1,38.105 68.161,38.044 68.161,35.736 v6(68.78,35.117)
  L8_Sig4 w0.1: v1(63.841,47.774) 63.841,47.604 64.192,47.254 64.301,47.254 64.541,47.013 65.124,47.013 65.186,47.075 65.276,47.075 65.29,47.089 65.553,47.089 65.649,46.994 v6(65.887,46.994) ; v6(66.925,47.529) 67.132,47.737 v3(67.132,48.693) ; v6(68.78,35.117) 68.812,35.149 v2(68.841,35.149) ; v2(79.904,33.55) 83.754,29.7 v3(92.202,29.7)
  L8_Bottom w0.1: v3(67.132,48.693) 67.009,48.816 67.009,49.265 67.736,49.993 v1(67.736,50.642) ; v3(92.202,29.7) 93.022,29.7 v4(94.421,31.1)
  other v2: 94.421,31.1
  other v3: 94.421,31.1
WIFI_SD_D0: B2.21 R62.2 U1.D21 | length 75.5
  L1_Top w0.1: U1.D21@63.841,47.149 63.85,47.14 v1(64.008,47.14) ; v9(89.758,28.73) 90.176,28.73 91.227,27.678 109.669,27.678 114.094,32.103 114.094,32.61 115.02,33.535 115.515,33.535 116.44,34.461 116.741,34.461 116.941,34.661 B2.21@116.941,34.973 v1(116.941,34.361)
  L3_Sig1 w0.1: v2(64.341,42.949) 64.341,41.78 64.42,41.702 64.42,41.676 64.727,41.369 64.914,41.369 65.71,40.574 65.71,40.486 65.859,40.337 66,40.337 v8(66.138,40.199)
  L5_Sig2 w0.1: v8(66.138,40.199) 66.166,40.17 66.166,39.779 66.602,39.344 66.791,39.344 67.346,38.789 67.346,38.599 67.902,38.044 68.091,38.044 68.646,37.489 68.646,37.299 68.886,37.059 68.886,36.949 70.493,35.342 70.493,35.053 70.846,34.7 70.846,34.685 70.917,34.614 71.031,34.614 71.061,34.644 71.191,34.644 71.221,34.614 71.628,34.614 72.116,34.126 72.116,34.02 72.023,33.927 72.023,33.821 72.138,33.706 72.138,33.697 74.248,31.587 74.248,29.885 74.534,29.599 76.789,29.599 76.978,29.788 v2(79.233,29.788)
  L6_Sig3 w0.1: v1(64.008,47.14) 64.082,47.065 64.082,46.874 64.016,46.808 64.016,45.953 64.039,45.93 64.039,45.868 63.995,45.824 63.968,45.824 v13(63.597,45.453) 63.551,45.453 63.296,45.199 63.296,44.739 63.369,44.667 63.409,44.667 63.479,44.597 63.479,44.556 63.536,44.499 63.536,43.71 64.159,43.087 64.204,43.087 v2(64.341,42.949) ; v2(79.233,29.788) 80.291,28.73 v9(89.758,28.73)
  L8_Bottom w0.1: R62.2@60.441,43.603 60.441,44.14 61.755,45.453 v13(63.597,45.453)
WIFI_SD_D1: B2.22 U1.E21 | length 64
  L1_Top w0.1: U1.E21@63.841,46.749 63.841,46.79 63.962,46.911 v1(63.962,46.924) ; v8(108.559,39.479) 109.419,38.619 116.047,38.619 117.841,36.824 v1(117.841,35.586) B2.22@117.841,34.973
  L5_Sig2 w0.1: v2(93.849,42.418) 95.318,40.949 100.692,40.949 102.162,39.479 v8(108.559,39.479)
  L6_Sig3 w0.1: v6(65.098,46.2) 65.381,45.917 65.381,45.041 65.533,44.889 65.749,44.889 65.97,45.11 65.97,45.92 66.117,46.066 66.418,46.066 66.497,45.987 66.53,45.987 66.542,45.975 67.013,45.975 67.016,45.977 67.523,45.977 67.657,46.112 67.657,46.208 67.792,46.343 67.889,46.343 68.509,46.963 69.47,46.963 69.566,47.058 v6(70.341,47.058) ; v6(83.062,43.59) 83.146,43.674 88.241,43.674 v6(88.95,42.965)
  L8_Sig4 w0.1: v1(63.962,46.924) 63.981,46.924 64.151,47.094 64.291,47.094 64.761,46.624 64.761,46.537 v6(65.098,46.2) ; v6(70.341,47.058) 70.666,46.733 70.666,46.27 71.307,45.63 72.188,45.63 74.069,43.749 74.214,43.749 74.364,43.599 80.077,43.599 80.088,43.61 80.187,43.61 80.198,43.599 80.388,43.599 80.543,43.753 81.781,43.753 82.126,44.099 82.554,44.099 v6(83.062,43.59) ; v6(88.95,42.965) 89.224,42.692 93.575,42.692 v2(93.849,42.418)
  other v2: 63.962,46.924
  other v4: 63.962,46.924
WIFI_SD_D2: B2.20 U1.C21 | length 60.3
  L1_Top w0.1: v1(63.841,47.363) U1.C21@63.841,47.549 ; B2.20@116.041,34.973 v1(116.041,38.455)
  L3_Sig1 w0.1: v1(63.841,47.363) 63.978,47.363 64.105,47.236 64.537,47.236 64.686,47.087 64.686,47.066 64.73,47.022 64.751,47.022 64.918,46.855 64.918,46.276 65.365,45.829 66.113,45.829 66.117,45.826 66.216,45.826 66.286,45.896 66.286,45.96 66.447,46.121 66.589,46.121 66.895,45.815 74.127,45.815 74.234,45.922 74.596,45.922 74.778,45.74 81.503,45.74 81.525,45.718 84.949,45.718 84.969,45.738 88.393,45.738 88.648,45.483 109.013,45.483 v1(116.041,38.455)
WIFI_SD_D3: B2.19 U1.D20 | length 62.8
  L1_Top w0.1: v1(64.241,46.974) U1.D20@64.241,47.149 ; v1(115.141,34.361) B2.19@115.141,34.973
  L3_Sig1 w0.1: v1(64.241,46.974) 64.241,45.604 65.317,44.528 65.317,44.498 65.388,44.427 65.419,44.427 66.045,43.8 67.527,43.8 67.598,43.729 69.258,43.729 69.333,43.654 72.581,43.654 74.218,45.291 74.218,45.567 74.333,45.682 74.497,45.682 74.612,45.567 74.612,45.337 76.14,43.809 87.332,43.809 88.043,43.098 90.261,43.098 90.332,43.027 90.332,42.927 89.967,42.562 89.225,42.562 88.86,42.198 88.86,42.098 90.621,40.337 v8(93.566,40.337)
  L5_Sig2 w0.1: v8(93.566,40.337) 101.134,40.337 v2(102.619,38.852)
  L6_Sig3 w0.1: v2(102.619,38.852) 102.795,38.676 v6(106.458,38.676)
  L8_Sig4 w0.1: v6(106.458,38.676) 108.616,36.518 112.984,36.518 v1(115.141,34.361)
WIFI_VBAT: B2.36 | length 0.6
  L1_Top w0.1: B2.36@121.879,45.661 v1(122.492,45.661)
WIFI_WAKE_HOST: R56.1 U1.C20 | length 11.7
  L1_Top w0.1: v1(64.241,47.374) U1.C20@64.241,47.549
  L5_Sig2 w0.1: v2(65.979,47.642) 66.058,47.562 66.058,47.526 66.181,47.403 66.302,47.403 66.536,47.637 ; 66.536,47.637 v9(66.769,47.871)
  L8_Sig4 w0.1: v1(64.241,47.374) 64.406,47.374 64.526,47.494 65.079,47.494 65.136,47.438 65.688,47.438 65.794,47.544 65.881,47.544 v2(65.979,47.642)
  L8_Bottom w0.1: v1(58.353,47.525) 58.369,47.541 59.8,47.541 59.847,47.494 60.155,47.494 60.202,47.541 62.923,47.541 63.331,47.949 64.538,47.949 64.613,48.024 66.566,48.024 R56.1@66.641,47.949
WOL_EN: U3.13 U6.2 | length 11
  L1_Top w0.203: v1(23.542,37.66) 23.553,37.649 U6.2@24.027,37.649 ; v1(33.041,37.863) U3.13@33.041,38.749
  L6_Sig3 w0.254: v1(23.542,37.66) 23.745,37.863 v1(33.041,37.863)
WOL_INTB: U3.12 | length 0.4
  L1_Top w0.203: v1(32.541,38.399) U3.12@32.541,38.749
pads on no net: B2.12 B2.24 B2.33 B2.35 B2.37 B2.48 J6.4 J7.A8 J7.B8 SW4.4 SW4.5 SW4.6 SW4.7 SW4.8 U1.A2 U1.A3 U1.A6 U1.A7 U1.A9 U1.A10 U1.A12 U1.A22 U1.A24 U1.A25 U1.AA6 U1.AA25 U1.AA28 U1.AA29 U1.AA30 U1.AA32 U1.AB6 U1.AB32 U1.AC31 U1.AC32 U1.AC33 U1.AD26 U1.AD32 U1.AE6 U1.AE25 U1.AE26 U1.AE28 U1.AE30 U1.AE31 U1.AE33 U1.AF31 U1.AF32 U1.AF33 U1.AG6 U1.AG28 U1.AG29 U1.AG30 U1.AG31 U1.AG32 U1.AH6 U1.AH25 U1.AH28 U1.AH29 U1.AH30 U1.AH31 U1.AH32 U1.AH33 U1.AJ21 U1.AJ26 U1.AJ32 U1.AJ33 U1.AK23 U1.AK24 U1.AK25 U1.AK28 U1.AK29 U1.AK30 U1.AK31 U1.AK32 U1.AL16 U1.AL17 U1.AL19 U1.AL25 U1.AL28 U1.AL29 U1.AL30 U1.AL31 U1.AL32 U1.AL33 U1.AM12 U1.AM15 U1.AM17 U1.AM23 U1.AM32 U1.AN4 U1.AN10 U1.AN11 U1.AN12 U1.AN15 U1.AN20 U1.AN27 U1.AN28 U1.AN30 U1.AN31 U1.AN32 U1.AP11 U1.AP12 U1.AP14 U1.AP15 U1.AP27 U1.AP28 U1.AP29 U1.AP30 U1.AP32 U1.AP33 U1.AR2 U1.AR3 U1.AR11 U1.AR12 U1.AR14 U1.AR15 U1.AR20 U1.AR27 U1.AR28 U1.AR30 U1.AR31 U1.AR32 U1.AR33 U1.AT2 U1.AT13 U1.AT14 U1.AT15 U1.AT16 U1.AT17 U1.AT21 U1.AT22 U1.AT23 U1.AT24 U1.AT25 U1.AT26 U1.AT27 U1.AT29 U1.AT30 U1.AT32 U1.AT33 U1.AU12 U1.AU13 U1.AU15 U1.AU16 U1.AU21 U1.AU24 U1.AU25 U1.AU27 U1.AU28 U1.AU29 U1.AU31 U1.AU32 U1.B1 U1.B2 U1.B4 U1.B5 U1.B7 U1.B9 U1.B10 U1.B12 U1.B22 U1.B24 U1.B25 U1.B27 U1.C3 U1.C4 U1.C6 U1.C7 U1.C8 U1.C10 U1.C22 U1.C23 U1.C24 U1.C26 U1.C27 U1.C30 U1.C31 U1.D1 U1.D2 U1.D3 U1.D4 U1.D6 U1.D7 U1.D8 U1.D10 U1.D15 U1.D23 U1.D24 U1.D26 U1.D30 U1.D31 U1.E2 U1.E3 U1.E5 U1.E8 U1.E24 U1.F2 U1.F3 U1.F4 U1.F5 U1.F8 U1.F21 U1.F24 U1.F28 U1.F29 U1.F30 U1.F31 U1.G1 U1.G3 U1.G4 U1.G5 U1.G6 U1.G28 U1.G29 U1.G30 U1.G31 U1.H2 U1.H3 U1.H21 U1.H22 U1.H24 U1.H31 U1.H33 U1.J2 U1.J3 U1.J4 U1.J5 U1.J6 U1.J25 U1.J28 U1.J31 U1.K1 U1.K3 U1.K4 U1.K5 U1.K6 U1.K24 U1.K28 U1.K29 U1.K30 U1.K31 U1.K32 U1.K33 U1.L2 U1.L3 U1.L17 U1.L32 U1.L33 U1.M2 U1.M3 U1.M4 U1.M5 U1.M28 U1.M29 U1.M30 U1.M31 U1.M32 U1.N1 U1.N3 U1.N4 U1.N5 U1.N8 U1.N15 U1.N30 U1.N31 U1.N32 U1.P2 U1.P3 U1.R2 U1.R3 U1.R4 U1.R6 U1.R29 U1.R30 U1.R31 U1.T1 U1.T3 U1.T4 U1.T29 U1.T30 U1.T31 U1.T32 U1.T33 U1.U2 U1.U3 U1.U31 U1.U33 U1.V2 U1.V3 U1.V4 U1.V5 U1.V28 U1.V29 U1.V30 U1.V31 U1.V32 U1.W6 U1.W29 U1.W30 U1.W31 U1.W32 U1.W33 U1.Y32 U1.Y33 U3.1 U3.2 U3.3 U3.18 U3.20 U3.21 U3.32 U4.A1 U4.A2 U4.A11 U4.A12 U4.AA1 U4.AA12 U4.AB1 U4.AB2 U4.AB9 U4.AB11 U4.AB12 U4.B1 U4.B12 U4.G11 U4.K5 U4.K8 U4.N5 U4.N8 U5.A1 U5.A2 U5.A7 U5.A8 U5.A9 U5.A10 U5.A11 U5.A12 U5.A13 U5.A14 U5.B1 U5.B7 U5.B8 U5.B9 U5.B10 U5.B11 U5.B12 U5.B13 U5.B14 U5.C1 U5.C3 U5.C5 U5.C7 U5.C8 U5.C9 U5.C10 U5.C11 U5.C12 U5.C13 U5.C14 U5.D1 U5.D2 U5.D3 U5.D4 U5.D12 U5.D13 U5.D14 U5.E1 U5.E2 U5.E3 U5.E5 U5.E8 U5.E9 U5.E10 U5.E12 U5.E13 U5.E14 U5.F1 U5.F2 U5.F3 U5.F10 U5.F12 U5.F13 U5.F14 U5.G1 U5.G2 U5.G3 U5.G10 U5.G12 U5.G13 U5.G14 U5.H1 U5.H2 U5.H3 U5.H12 U5.H13 U5.H14 U5.J1 U5.J2 U5.J3 U5.J12 U5.J13 U5.J14 U5.K1 U5.K2 U5.K3 U5.K6 U5.K7 U5.K10 U5.K12 U5.K13 U5.K14 U5.L1 U5.L2 U5.L3 U5.L12 U5.L13 U5.L14 U5.M1 U5.M2 U5.M3 U5.M7 U5.M8 U5.M9 U5.M10 U5.M11 U5.M12 U5.M13 U5.M14 U5.N1 U5.N3 U5.N6 U5.N7 U5.N8 U5.N9 U5.N10 U5.N11 U5.N12 U5.N13 U5.N14 U5.P1 U5.P2 U5.P7 U5.P8 U5.P9 U5.P10 U5.P11 U5.P12 U5.P13 U5.P14 U6.1 U12.5 U12.6 U12.12 U12.13 U15. U16. U25.2
copper on no net: | length 72.7
  L1_Top w0.04: 69.902,34.089 70.397,34.089 v4(70.429,34.057) ; 69.941,42.349 69.952,42.339
  L1_Top w0.25: v5(58.941,43.697) 58.941,43.949 ; v5(58.941,44.897) 58.941,45.149 ; 59.741,41.549 v5(59.993,41.549) ; 59.741,45.149 v5(59.993,45.149) ; v5(59.741,47.297) 59.741,47.549 ; v5(60.141,47.297) 60.141,47.549 ; v5(60.941,44.097) 60.941,44.349 ; 62.641,33.149 v5(62.893,33.149) ; 62.641,48.349 v5(62.893,48.349) ; 63.041,47.149 v5(63.293,47.149) ; 63.841,33.149 v5(64.093,33.149) ; v5(65.989,34.349) 66.241,34.349 ; v5(66.789,33.149) 67.041,33.149 ; v5(67.989,48.349) 68.241,48.349 ; v5(69.189,48.349) 69.441,48.349 ; v5(69.689,37.149) 69.941,37.149 ; v5(69.689,37.549) 69.941,37.549 ; v5(69.689,38.349) 69.941,38.349 ; v5(69.689,39.549) 69.941,39.549 ; v5(69.689,39.949) 69.941,39.949 ; v5(69.689,40.749) 69.941,40.749 ; v5(69.689,44.349) 69.941,44.349 ; v5(69.941,46.797) 69.941,47.049 ; v5(70.089,46.449) 70.341,46.449 ; 70.741,46.049 v5(70.741,46.301) ; v5(70.741,46.597) 70.741,46.849 ; v5(70.741,47.297) 70.741,47.549 ; v5(70.889,41.549) 71.141,41.549 ; v5(70.889,42.749) 71.141,42.749 ; v5(70.889,43.949) 71.141,43.949 ; v5(70.889,45.149) 71.141,45.149 ; 71.141,46.849 v5(71.141,47.101) ; 71.941,47.776 71.941,47.949
  L1_Top w0.254: v5(8.764,38.349) 9.441,38.349 ; v5(8.764,41.349) 9.441,41.349 ; v14(13.056,55.049) v14@13.512,55.049 ; v14@13.512,55.049 14.441,55.049 ; v5(23.458,38.324) 24.026,38.324 ; v14(24.441,76.164) 24.441,77.349 ; 44.691,37.599 44.941,37.849 ; v5(44.691,38.099) 44.941,38.349 ; v5(44.691,38.599) 44.941,38.849 ; v5(44.691,39.099) 44.941,39.349 ; v5(44.691,39.599) 44.941,39.849 ; v5(44.691,40.099) 44.941,40.349 ; v5(44.691,41.099) 44.941,40.849 ; v5(44.691,41.599) 44.941,41.349 ; v5(44.691,42.099) 44.941,41.849 ; v5(44.691,42.599) 44.941,42.349 ; v5(44.691,43.099) 44.941,42.849 ; v5(44.691,43.599) 44.941,43.349 ; v5(44.691,44.099) 44.941,43.849 ; v5(45.191,37.599) 45.441,37.849 ; v5(45.191,38.099) 45.441,38.349 ; v5(45.191,38.599) 45.441,38.849 ; v5(45.191,39.099) 45.441,39.349 ; v5(45.191,39.599) 45.441,39.849 ; v5(45.191,40.099) 45.441,40.349 ; v5(45.191,41.099) 45.441,40.849 ; v5(45.191,41.599) 45.441,41.349 ; v5(45.191,42.099) 45.441,41.849 ; v5(45.191,42.599) 45.441,42.349 ; v5(45.191,43.099) 45.441,42.849 ; v5(45.191,43.599) 45.441,43.349 ; 45.441,43.849 v5(45.691,43.599) ; v5(45.691,37.099) 45.941,37.349 ; v5(45.691,37.599) 45.941,37.849 ; v5(45.691,38.099) 45.941,38.349 ; v5(45.691,38.599) 45.941,38.849 ; v5(45.691,39.099) 45.941,39.349 ; v5(45.691,39.599) 45.941,39.849 ; v5(45.691,40.099) 45.941,40.349 ; v5(45.691,41.099) 45.941,40.849 ; v5(45.691,41.599) 45.941,41.349 ; v5(45.691,42.099) 45.941,41.849 ; v5(45.691,42.599) 45.941,42.349 ; v5(45.691,43.099) 45.941,42.849 ; 45.941,43.349 v5(46.191,43.099) ; 45.941,43.849 v5(46.191,43.599) ; v5(46.191,37.099) 46.441,37.349 ; v5(46.191,37.599) 46.441,37.849 ; v5(46.191,38.099) 46.441,38.349 ; 46.441,42.849 v5(46.691,43.099) ; 46.441,43.349 v5(46.691,43.599) ; 46.441,43.849 v5(46.691,44.099) ; v5(46.691,37.099) 46.941,37.349 ; v5(46.691,37.599) 46.941,37.849 ; v5(46.691,38.099) 46.941,38.349 ; v5(46.691,39.099) 46.941,39.349 ; v5(46.691,39.599) 46.941,39.849 ; v5(46.691,40.099) 46.941,40.349 ; v5(46.691,42.099) 46.941,41.849 ; 46.941,42.849 v5(47.191,43.099) ; 46.941,43.349 v5(47.191,43.599) ; 46.941,43.849 v5(47.191,44.099) ; v5(47.191,37.099) 47.441,37.349 ; v5(47.191,37.599) 47.441,37.849 ; v5(47.191,38.099) 47.441,38.349 ; v5(47.191,39.099) 47.441,39.349 ; 47.441,42.849 v5(47.691,42.599) ; 47.441,43.349 v5(47.691,43.599) ; 47.441,43.849 v5(47.691,44.099) ; v5(47.691,37.099) 47.941,37.349 ; v5(47.691,37.599) 47.941,37.849 ; v5(47.691,38.099) 47.941,38.349 ; v5(47.691,39.099) 47.941,39.349 ; v5(47.691,43.099) 47.941,43.349 ; 47.941,43.849 v5(48.191,44.099) ; v5(48.191,37.099) 48.441,37.349 ; v5(48.191,37.599) 48.441,37.849 ; v5(48.191,38.099) 48.441,38.349 ; v5(48.191,42.599) 48.441,42.849 ; v5(48.191,43.099) 48.441,43.349 ; v5(48.191,43.599) 48.441,43.849 ; 48.441,41.849 v5(48.691,42.099) ; v5(48.691,41.599) 48.941,41.849 ; v5(49.191,38.599) 49.441,38.349 ; v5(49.191,39.099) 49.441,39.349 ; v5(49.691,39.099) 49.941,38.849 ; v5(50.191,39.099) 50.441,38.849 ; v5(50.191,39.599) 50.441,39.349 ; v5(50.191,40.099) 50.441,39.849 ; v5(50.191,40.599) 50.441,40.849 ; v5(50.191,43.099) 50.441,43.349 ; 50.441,41.849 v5(50.691,41.599) ; 50.441,42.349 v5(50.691,42.099) ; 50.441,42.849 v5(50.691,42.599) ; v5(50.691,41.099) 50.941,41.349 ; v5(50.691,44.099) 50.941,43.849 ; 50.941,41.849 v5(51.191,41.599) ; 50.941,42.349 v5(51.191,42.099) ; 50.941,42.849 v5(51.191,42.599) ; 51.191,37.099 51.441,37.349 ; v5(51.191,41.099) 51.441,40.849 ; 51.441,39.349 52.251,39.349 ; 51.441,39.849 52.251,39.849 ; 51.441,40.349 52.251,40.349 ; 51.441,41.349 v5(51.691,41.099) ; 51.441,41.849 v5(51.691,41.599) ; 51.441,42.349 v5(51.691,42.099) ; 51.441,42.849 v5(51.691,42.599) ; 51.441,43.349 v5(51.691,43.099) ; 51.441,43.849 v5(51.691,43.599) ; 80.241,33.799 v5(80.538,33.799) ; 80.241,46.799 v5(80.538,46.799) ; v5(80.241,47.152) 80.241,47.449 ; 81.041,33.799 v5(81.338,33.799) ; 81.041,47.449 v5(81.338,47.449) ; 83.441,39.649 83.441,39.999 83.441,40.454 ; 85.841,39.649 v5(85.841,39.946) ; v5(87.944,33.799) 88.241,33.799 ; v5(87.944,47.449) 88.241,47.449 ; v5(88.744,33.799) 89.041,33.799 ; v5(88.744,46.799) 89.041,46.799 ; v5(89.041,47.152) 89.041,47.449 ; v14(97.427,62.099) 98.427,63.099 100.006,63.099 ; 100.691,63.784 100.691,65.109 102.383,66.801 v14(102.383,67.981) ; 102.876,61.599 v14(103.931,61.599) ; 108.841,34.973 v5(108.841,35.663) ; 110.641,47.349 v14(110.641,48.547) ; 119.641,34.973 v14(119.641,37.679) ; v5(120.239,45.022) 120.532,45.022 120.792,44.761 121.879,44.761 ; v5(120.541,46.66) 120.541,47.349 ; v14(120.682,42.961) 121.879,42.961
  other v2: 70.429,34.057 69.993,42.606
  other v3: 69.993,42.606
  other v4: 69.993,42.606
  other v5: 51.691,38.099 84.546,42.504

## Polygon pours and split planes (outlines as drawn)
no net on L2_PWR1 (split plane): 141.931,71.138 141.931,17.561 125.23,0.86 10.653,0.86 0.952,10.561 0.952,72.138 10.653,81.839 131.23,81.839
VDDAO_3V3 on L4_GND1 (split plane): 141.931,71.138 141.931,17.561 125.23,0.86 10.653,0.86 0.952,10.561 0.952,72.138 10.653,81.839 131.23,81.839
GND on L7_GND2 (split plane): 141.931,71.138 141.931,17.561 125.23,0.86 10.653,0.86 0.952,10.561 0.952,72.138 10.653,81.839 131.23,81.839
no net on L9_GND3 (split plane): 141.931,71.138 141.931,17.561 125.23,0.86 10.653,0.86 0.952,10.561 0.952,72.138 10.653,81.839 131.23,81.839